# Altium PCB F电源板.PcbDoc
Units mil, origin at the board's own origin, x right, y up, seen from the top; angles counter-clockwise.
Board outline 4960.63 x 1771.65 mil, 4 copper layers (Top Layer, GND, PWR, Bottom Layer), stack 23.756 mil thick; 107 components, 59 nets, 267 pads, 65 vias.
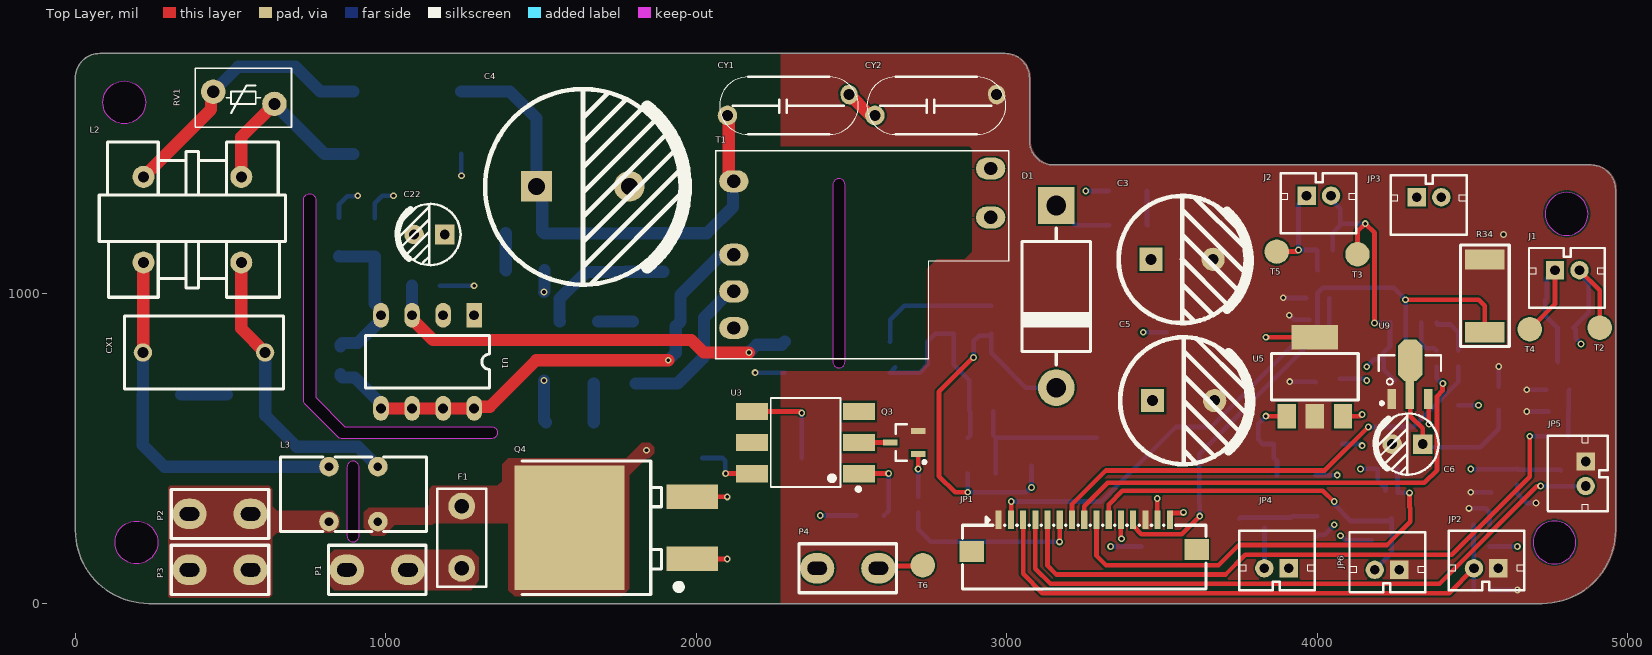
[diagram p0: Top Layer view]
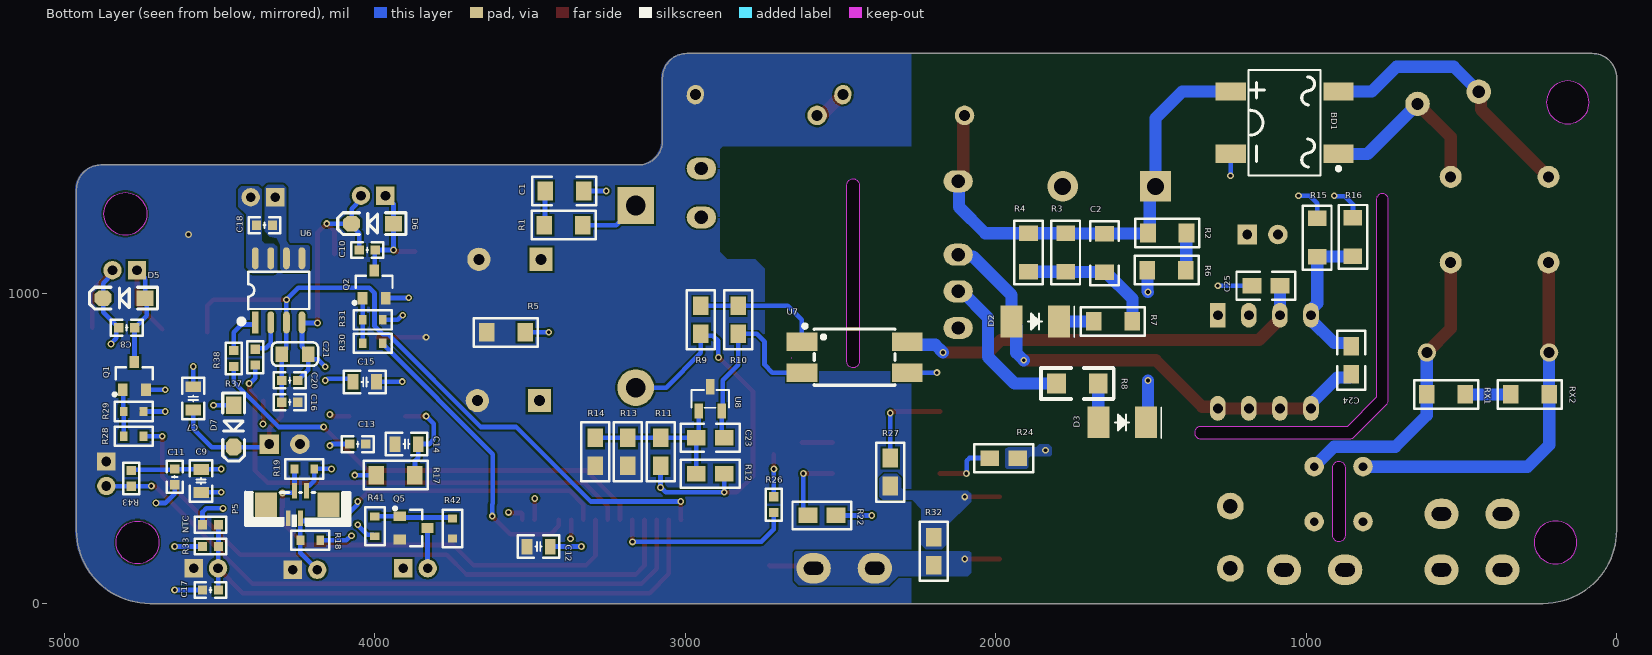
[diagram p1: Bottom Layer view, seen from below]
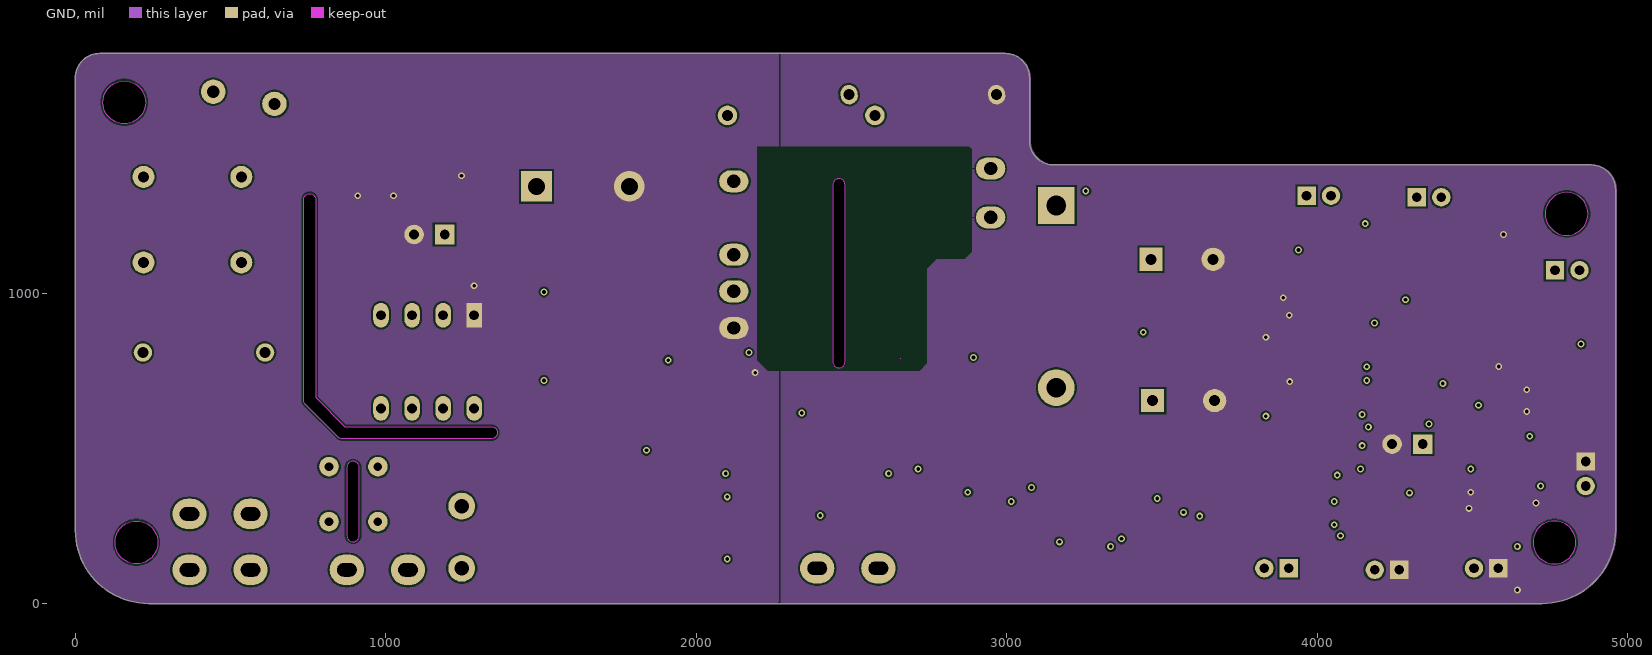
[diagram p2: GND]
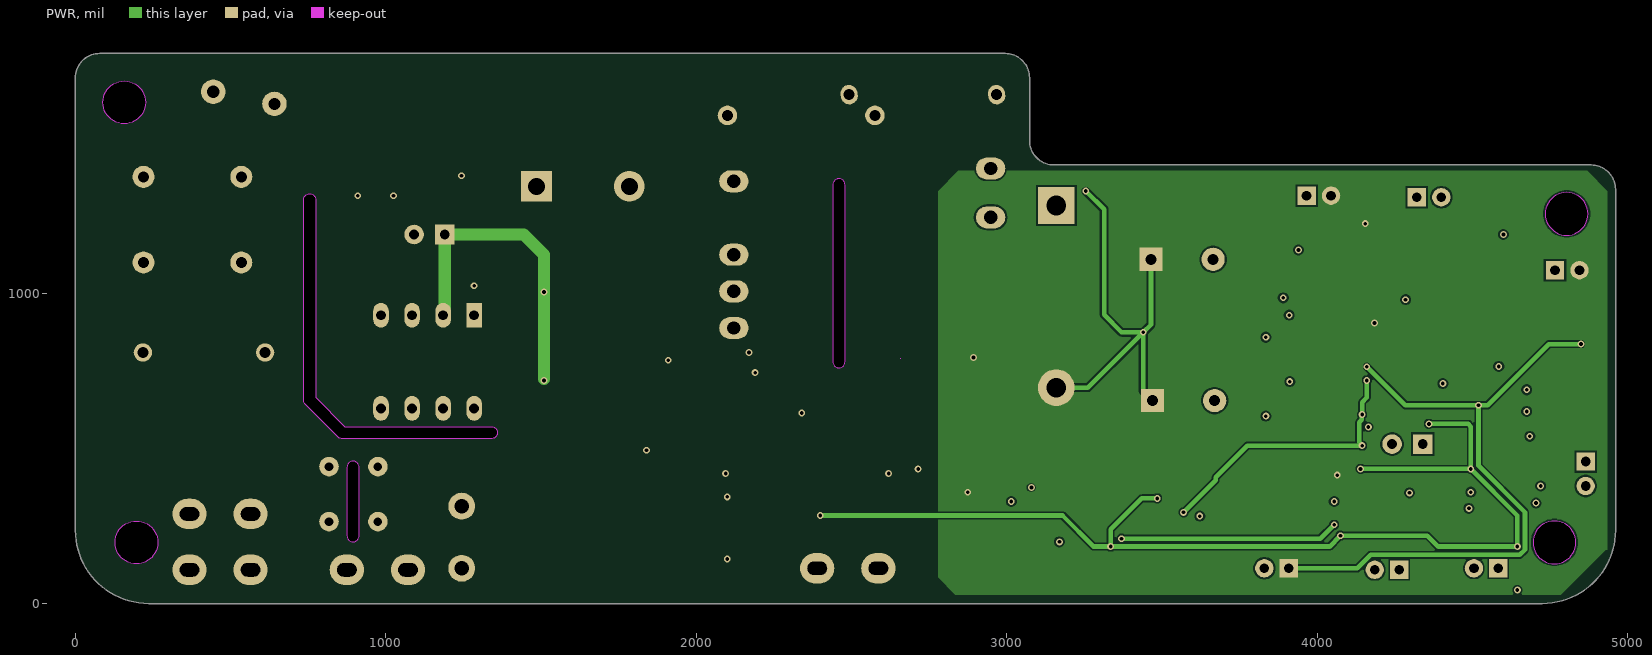
[diagram p3: PWR]
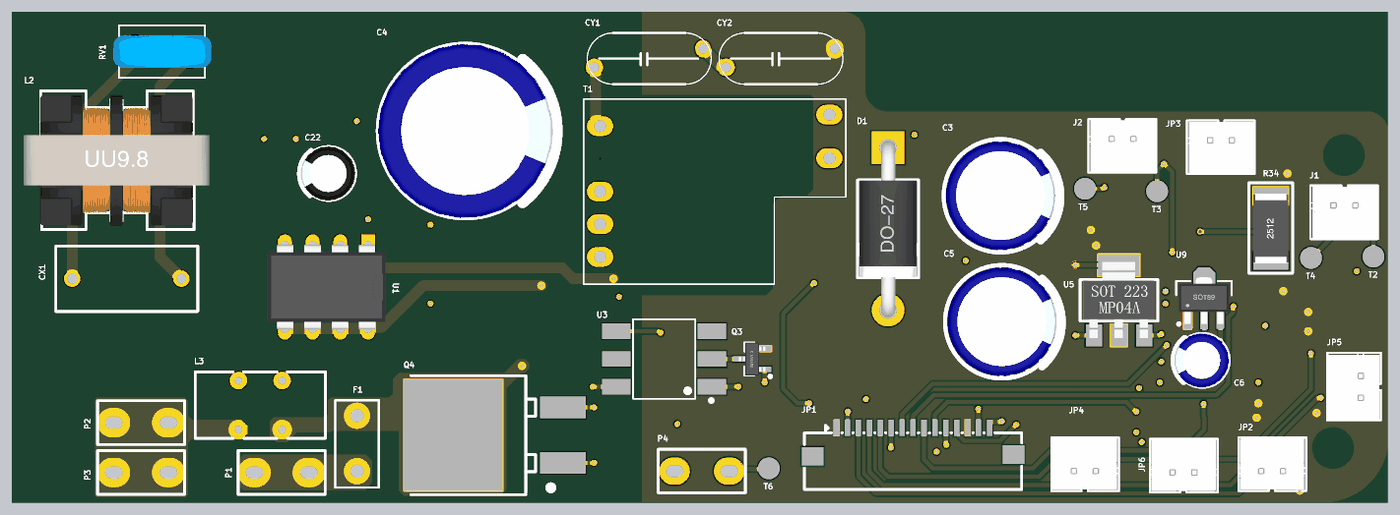
[diagram p4: 3D render of the assembled board from above, using the file's embedded part models]
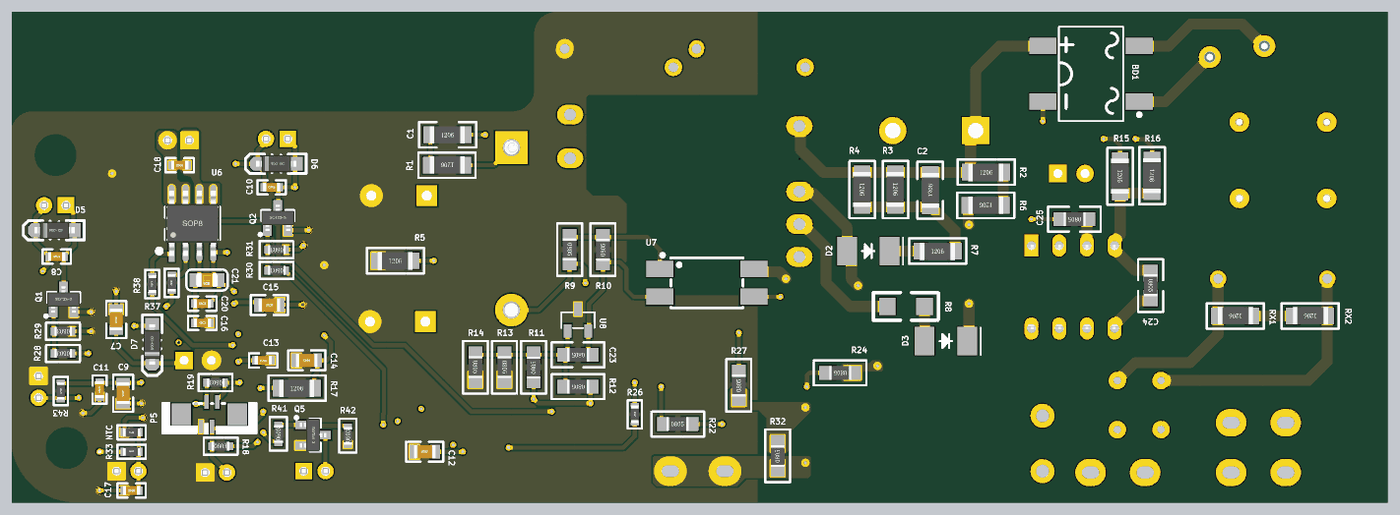
[diagram p5: 3D render of the assembled board from below, using the file's embedded part models]

## Layer stack, top to bottom
Top Solder: solder mask 0.4, Solder Resist, Dk 3.5
Top Layer: signal copper 1.4
Dielectric 2: prepreg 2.8, PP-006, Dk 4.1
GND: signal copper 1.378
Dielectric 1: dielectric 12.6, FR-4, Dk 4.8
PWR: signal copper 1.378
Dielectric 3: prepreg 2.8, PP-006, Dk 4.1
Bottom Layer: signal copper 1.4
Bottom Solder: solder mask 0.4, Solder Resist, Dk 3.5

## Board outline
0.55,237.71 0.55,1694.4 cw(c79.29,1694.4) 79.29,1773.14 2995.11,1773.14 cw(c2995.11,1694.4) 3073.85,1694.4 3073.85,1492.65 ccw(c3152.59,1492.65) 3152.59,1413.91 4882.44,1413.91 cw(c4882.44,1335.17) 4961.18,1335.17 4961.18,237.71 cw(c4724.96,237.71) 4724.96,1.49 236.77,1.49 cw(c236.77,237.71)
cut-out: 875.3,220 ccw(c895,220) 914.7,220 914.7,440 ccw(c895,440) 875.3,440
cut-out: 741.38,642.9 cw(c755.3,656.84) 735.6,656.84 735.6,1301.84 cw(c755.3,1301.84) 775,1301.84 775,665 868.46,571.54 1340.3,571.54 cw(c1340.3,551.84) 1360,551.84 cw(c1340.3,551.84) 1340.3,532.14 860.3,532.14 cw(c860.3,551.84) 846.37,537.91 846.38,537.9
cut-out: 2440.3,780 ccw(c2460,780) 2479.7,780 2479.7,1350 ccw(c2460,1350) 2440.3,1350
cut-out: 4734.8,1256.43 ccw(c4803.7,1256.43) 4803.7,1187.54 ccw(c4803.7,1256.43) 4872.6,1256.43 ccw(c4803.7,1256.43) 4803.7,1325.33 ccw(c4803.7,1256.43)
cut-out: 4695.43,198.34 ccw(c4764.33,198.34) 4764.33,129.44 ccw(c4764.33,198.34) 4833.23,198.34 ccw(c4764.33,198.34) 4764.33,267.23 ccw(c4764.33,198.34)
cut-out: 197.4,129.44 cw(c197.4,198.34) 128.5,198.34 cw(c197.4,198.34) 197.4,267.23 cw(c197.4,198.34) 266.3,198.34 cw(c197.4,198.34)
cut-out: 158.03,1546.76 cw(c158.03,1615.66) 89.13,1615.66 cw(c158.03,1615.66) 158.03,1684.56 cw(c158.03,1615.66) 226.93,1615.66 cw(c158.03,1615.66)

## Design rules (kind name [scope] priority, off if disabled: settings)
Clearance [All] p1: gap=6 ignorepadtopadclearanceinfootprint=FALSE
HoleSize [All] p1: absolutevalues=TRUE maxlimit=300 minlimit=1 maxpercent=80.000 minpercent=20.000
PolygonConnect [All] p1: connectstyle=Direct reliefconductorwidth=10 reliefentries=4 polygonreliefangle="90 Angle" airgapwidth=10
RoutingCorners [All] p1: cornerstyle=45-Degree minsetback=10 maxsetback=10
RoutingVias [All] p1: holewidth=12 width=22 viastyle="Through Hole" minholewidth=12 minwidth=22 maxholewidth=12 maxwidth=22
SilkToSolderMaskClearance [IsPad] p1: minsilkscreentomaskgap=0 clearancetoexposedcopper=TRUE
SolderMaskExpansion [All] p1: expansion=4 istentingtop=FALSE
UnRoutedNet [All] p1: checkbadconnections=TRUE
Width Width_AC [InNetClass('AC')] p1: maxlimit=50 minlimit=10 preferedwidth=39.37
Width Width_PWR [InNetClass('PWR')] p2: maxlimit=40 minlimit=15 preferedwidth=20
Width [All] p3: maxlimit=15 minlimit=8 preferedwidth=10
26 further rules are at their usual default settings.

## Classes and differential pairs
net class AC: FB NetBD1_1 NetBD1_2 NetBD1_3 NetC2_1 NetC24_1 NetC24_2 NetCX1_1 NetCX1_2 NetCY1_2 NetD2_2 NetD3_1 NetF1_2 NetL3_1 NetR2_2 NetR8_2 NetRX1_1
net class GND: GND SGND
net class PWR: 12V_EN +5V +5V_MCU +12V VCC

## Components (designator, comment, footprint, x,y, rotation, side; value= is the part's Value field where it differs from the comment)
BD1 "DB107S" DBS_L8.4-W6.4-P5.10-LS10.2-BL 1070,1550 r90 bottom
C1 "221" 1206c 3390,1330 r180 bottom
C2 "222" 1206c 1650,1130 r90 bottom
C3 "35V 470uF" "CAP 5.0*10*16" 3565,1110 r0 top
C4 "56U" "CAP 7.5*16*25" 1635.39,1343.5 r0 top
C5 "35V 470uF" "CAP 5.0*10*16" 3570,655 r0 top
C6 "100UF/25V" "CAP 2.5*5*11" 4290.79,515 r180 top
C7 "100nF/25V/0805" "C 0805_L" 4585,662.4 r90 bottom
C8 "100NF/50V/0603" "C 0603_L" 4799.41,890 r180 bottom
C9 "10UF/16V/0805" "C 0805_L" 4560,396.22 r270 bottom
C10 "100NF/50V/0603" "C 0603_L" 4024.41,1140 r180 bottom
C11 "100NF/50V/0603" "C 0603_L" 4645,409.41 r90 bottom
C12 "10UF/16V/0805" "C 0805_L" 3472.6,185 r180 bottom
C13 "100NF/50V/0603" "C 0603_L" 4055,515 r0 bottom
C14 "10UF/25V/0805" "C 0805_L" 3897.6,515 r0 bottom
C15 "10UF/16V/0805" "C 0805_L" 4032.6,715 r180 bottom
C16 "100NF/50V/0603" "C 0603_L" 4274.41,650 r180 bottom
C17 "100NF/50V/0603" "C 0603_L" 4529.41,45 r0 bottom
C18 "100NF/50V/0603" "C 0603_L" 4355.59,1220 r0 bottom
C20 "100NF/50V/0603" "C 0603_L" 4274.41,720 r180 bottom
C21 "22UF/25V/0805" 0805C-S 4215,805 r0 bottom
C22 "10U" "CAP 2.5*5*11 - BK" 1140.79,1190 r180 top
C23 "333" 0805C 2875,535 r0 bottom
C24 "22pF" 0805C 855,830 r270 bottom
C25 "103" 0805C 1085,1025 r0 bottom
CX1 "0.22uF" CAP-TH_L13.0-W6.0-P10.00-D1.2 415,810 r0 top
CY1 "400V  222" CY2-P10*4.7 2280,1605 r0 top
CY2 "400V  222" CY2-P10*4.7 2755,1605 r0 top
D1 "SR5100" do-27 3160,990 r270 top
D2 "4007" SMA 1950,910 r180 bottom
D3 "RS1M" SMA 1670,585 r180 bottom
D5 "ss24" SOD-123 4807.5,985 r0 bottom
D6 "ss24" SOD-123 4007.5,1225 r0 bottom
D7 "ss14" SOD-123 4455,572.5 r270 bottom
F1 "250V/3.15A" MST8*4 1245,315 r270 top
J1 "PH2.0-2P直插" PH2.0-LI-2P 4805.63,1075 r0 top
J2 "PH2.0-2P直插" PH2.0-LI-2P 4005.63,1315 r0 top
JP1 "Header 15" FPC-SMD_15P-P1.00_XUNPU_FPC-1.0FX-15PWCR-H20 3250,220 r0 top
JP2 "HDR-1X2" PH2.0-LI-2P 4544.37,115 r180 top
JP3 "HDR-1X2" PH2.0-LI-2P 4360.63,1310 r0 top
JP4 "HDR-1X2" PH2.0-LI-2P 3869.37,115 r180 top
JP5 "HDR-1X2" PH2.0-LI-2P 4865,419.37 r270 top
JP6 "HDR-1X2" PH2.0-LI-2P 4225,110 r180 top
L2 "" UU9.8 377.52,1237.8 r0 top
L3 "PDMCAT953-501MLN" IND-TH_4P-L12.0-W6.0_PDMCAT953-501MLN 896.26,353.58 r0 top
NTC "10K" "R 0603_L" 4529.41,255 r0 bottom
P1 "L" 4.8*0.8 875,110 r0 top
P2 "N" 4.8*0.8 565,290 r180 top
P3 "PTC-" 4.8*0.8 565,110 r180 top
P4 "PTC+" 4.8*0.8 2586.85,115 r180 top
P5 "Header 4" FPC-SMD_FPC-0.5-4P-LTH2.0 4249.61,320 r0 bottom
Q1 "AO3400" "SOT23-3L -big" 4775,735 r180 bottom
Q2 "AO3400" "SOT23-3L -big" 4002.4,1030 r180 bottom
Q3 "SS8050" SOT23-3N 2670,520 r90 top
Q4 "BTA12_600" TO-263AB_L10.0-W9.2-P5.08-LS15.4-BL 1790,245 r90 top
Q5 "AO3400" "SOT23-3L -big" 3875,245 r270 bottom
R1 "22R" 1206R 3392,1220 r0 bottom
R2 "1M" 1206R 1448,1195 r180 bottom
R3 "200K" 1206R 1775,1132 r270 bottom
R4 "200K" 1206R 1895,1132 r270 bottom
R5 "NC" 1206R 3578,875 r180 bottom
R6 "1M" 1206R 1450,1075 r0 bottom
R7 "47R" 1206R 1623,910 r180 bottom
R8 "10R" 1206 1670,710 r0 bottom
R9 "1K" 0805R 2950,960 r270 bottom
R10 "5.1k" 0805R 2830,870 r90 bottom
R11 "24k" 0805R 3080,445 r90 bottom
R12 "100k" 0805R 2875,420 r0 bottom
R13 "NC" 0805R 3185,535 r270 bottom
R14 "5.1k" 0805R 3290,535 r270 bottom
R15 "1R" 1206R 965,1180 r270 bottom
R16 "1R" 1206R 850,1182 r270 bottom
R17 "0R/1206" 1206R 3933,415 r180 bottom
R18 "10K/5%/0603" 0603R 4208,205 r180 bottom
R19 "10K/5%/0603" 0603R 4227,435 r0 bottom
R22 "330R/0805/5%" 0805R 2605,285 r180 bottom
R24 "330R/0805/5%" 0805R 1930,470 r0 bottom
R26 "1K/0603/5%" "R 0603_L" 2715,320 r90 bottom
R27 "330R/0805/5%" 0805R 2340,380 r90 bottom
R28 "100R/5%/0603" 0603R 4777,540 r0 bottom
R29 "10K/5%/0603" 0603R 4777,620 r0 bottom
R30 "100R/5%/0603" 0603R 4007,840 r0 bottom
R31 "10K/5%/0603" 0603R 4007,915 r0 bottom
R32 "330R/0805/5%" 0805R 2200,125 r90 bottom
R33 "10K" "R 0603_L" 4529.41,185 r180 bottom
R34 "0.2R/2512/1%" "R 2512_L" 4540,991.14 r90 top
R37 "1K/0603/5%" "R 0603_L" 4455,790.59 r90 bottom
R38 "1K/0603/5%" "R 0603_L" 4385,795 r90 bottom
R41 "100R/5%/0603" 0603R 4000,250 r90 bottom
R42 "10K/5%/0603" 0603R 3750,243 r90 bottom
R43 "10K/0603/1%" "R 0603_L" 4785,404.41 r270 bottom
RV1 "7D471K" "VDR 7D-5" 641.85,1630.32 r180 top
RX1 "2M" 1206R 550,675 r0 bottom
RX2 "2M" 1206R 280,675 r0 bottom
T1 "PQ2016" EE1610 2535,1125 r0 top locked
T2 "TP" TP_2.0MM 4910,890 r0 top
T3 "TP" TP_2.0MM 4130,1126 r0 top
T4 "TP" TP_2.0MM 4685,885 r0 top
T5 "TP" TP_2.0MM 3870,1135 r0 top
T6 "TP" TP_2.0MM 2730,125 r0 top
U1 "ME8123" DIP8 1285,930 r270 top
U3 "3063" SMD-6_L7.3-W6.5-P2.54-LS10.2-BL 2352.44,520 r90 top
U5 "MD8550/SOT223-3" SOT-223 3990,735 r0 top
U6 "MD7622" SOP8_N 4310,1010 r90 bottom
U7 "PC817" SMD-4 2455,795 r180 bottom
U8 "ME431" SOT-23-3_ME431 2920,660.63 r270 bottom
U9 "MD7350A/SOT89" SOT89_M 4299,741 r0 top

## Footprints (in the part's own frame and the unit in brackets; to place one, negate y for a bottom-side part, rotate by r counter-clockwise, add the part's x,y. Pads: shape width x height; smd on the part's side, far side on the other; paste and mask are expansions set on the pad)
4.8*0.8 [mm]
  oval 2.8x2.5 hole 1.1 slot 1.6 at 0 deg: 1(0,0) 1(5,0)
  silkscreen extent -1.49,-2.01 6.49,2.01, body extent -1.52,-0.41 6.49,0.39, height 9.3
0603R [mil]
  rect 25x30 smd: 1(-32,0) 2(32,0)
  silkscreen extent -61,-31 61,31, body extent -32,-16 30,16, height 18
0805C [mil] "2.0mmx1.2mm（蒜米工坊）"
  rect 60x50 smd: 1(0,0) 2(90,0)
  silkscreen extent -50,-45 140,45, body extent 5,-25 83,25, height 22
0805C-S [mil]
  rect 40x50 smd: 1(0,0) 2(85,0)
  silkscreen extent -32,-38 117,38, body extent 3,-25 82,25, height 30
0805R [mil]
  rect 60x50 smd: 1(0,0) 2(90,0)
  silkscreen extent -50,-45 140,45, body extent 5,-25 83,25, height 22
1206 [mm]
  rect 1.52x1.6 smd: 1(0,0) 2(3.42,0)
  silkscreen extent -1.27,-1.27 4.69,1.27
1206c [mil] "3.2mmx1.6mm（蒜米工坊）"
  rect 50x60 smd: 1(-62,0) 2(62,0)
  silkscreen extent -103,-46 103,46, body extent -64,-32 62,31, height 24
1206R [mil]
  rect 50x60 smd: 1(-62,0) 2(62,0)
  silkscreen extent -103,-46 103,46, body extent -64,-32 62,31, height 24
"C 0603_L" [mil] "无极性贴片电容"
  rect 30x30 smd: 1(-25.59,0) 2(25.59,0)
  silkscreen extent -51,-26 51,26, body extent -31,-16 31,16, height 32
"C 0805_L" [mil] "无极性贴片电容"
  rect 35x50 smd: 1(-37.4,0) 2(37.4,0)
  silkscreen extent -67,-36 67,36, body extent -39,-24 39,24, height 20
"CAP 2.5*5*11" [mm] "脚距2.5mm直径5mm高度11mm"
  rect 1.6x1.6 hole 0.8: 1(-1.25,0)
  round 1.6 hole 0.8: 2(1.25,0)
  silkscreen extent -2.55,-2.5 2.6,2.5, body extent -2.5,-2.5 2.51,2.5, height 11.03
"CAP 2.5*5*11 - BK" [mm] "脚距2.5mm直径5mm高度11mm"
  rect 1.6x1.6 hole 0.8: 1(-1.25,0)
  round 1.6 hole 0.8: 2(1.25,0)
  silkscreen extent -2.55,-2.5 2.6,2.5, body extent -2.5,-2.5 2.51,2.5, height 11.04
"CAP 5.0*10*16" [mm] "脚距5mm直径10mm高度16mm"
  rect 1.9x1.9 hole 0.9: 1(-2.54,0)
  round 1.9 hole 0.9: 2(2.54,0)
  silkscreen extent -5.19,-5.21 5.5,5.19, body extent -5,-5 5.01,5, height 16.04
"CAP 7.5*16*25" [mm] "脚距7.5mm直径16mm高度25mm"
  rect 2.5x2.5 hole 1.4: 1(-3.8,0.038)
  round 2.5 hole 1.4: 2(3.8,0.038)
  silkscreen extent -8,-8 8.42,8, body extent -8,-8 8.01,8, height 25.03
CAP-TH_L13.0-W6.0-P10.00-D1.2 [mm]
  round 1.5 hole 0.9: 1(-5,0) 2(5,0)
  silkscreen extent -6.5,-3 6.5,3, body extent -6.47,-2.97 6.51,2.94, height 12.5
CY2-P10*4.7 [mm]
  round 1.6 hole 0.9: 1(-4.55,-0.8)
  oval 1.4x1.6 hole 0.9 rot 10: 2(5.4,0.9)
  silkscreen extent -5.2,-2.35 6.15,2.35, body extent -4.96,-2.12 5.88,2.13, height 8
DBS_L8.4-W6.4-P5.10-LS10.2-BL [mm]
  rect 1.505x2.47 smd: 1(-2.55,-4.41) 2(2.55,-4.41) 3(2.55,4.41) 4(-2.55,4.41)
  silkscreen extent -4.33,-4.56 4.33,2.95
DIP8 [mil] "8脚300mil直插集成电路（蒜米工坊）"
  rect 80x50 hole 32: 1(0,0)
  oval 80x50 hole 32: 2(0,-100) 3(0,-200) 4(0,-300) 5(300,-300) 6(300,-200) 7(300,-100) 8(300,0)
  silkscreen extent 65,-350 235,50, body extent -3,-363 303,63, height 177
do-27 [mm] "5.2*14.9mm(直径，脚距）"
  rect 3x3 hole 1.6: 1(-7.45,0)
  round 3 hole 1.6: 2(7.45,0)
  silkscreen extent -5.59,-2.79 5.59,2.79, body extent -8.1,-2.6 8.1,2.6, height 5.25
EE1610 [mm]
  oval 2.4x1.8 hole 1.1: 1(-10.5,6) 3(-10.5,0) 5(-10.5,-6) 7(10.5,7.05)
  round 0 all layers, no hole: 2(-10.5,3)
  oval 2.4x1.8 hole 1.1 paste+0: 4(10.5,3.05) 6(-10.5,-3)
  Keep-Out Layer lines w0.1: 3.1,-8.49 3.15,-8.49 3.16,-8.48
  silkscreen extent -12.02,-8.52 12,8.5, body extent -12,-8.51 11.97,8.51, height 15.5
FPC-SMD_15P-P1.00_XUNPU_FPC-1.0FX-15PWCR-H20 [mm]
  rect 0.5x1.5 smd paste+0 mask+0.05: 1(-7,1.3) 2(-6,1.3) 3(-5,1.3) 4(-4,1.3) 5(-3,1.3) 6(-2,1.3) 7(-1,1.3) 8(0,1.3) 9(1,1.3) 10(2,1.3) 11(3,1.3) 12(4,1.3) 13(5,1.3) 14(6,1.3) 15(7,1.3)
  rect 2x1.7 smd paste+0 mask+0.05: 16(9.2,-1.143) 17(-9.2,-1.3)
  silkscreen extent -9.95,-4.35 9.95,1.53
FPC-SMD_FPC-0.5-4P-LTH2.0 [mm]
  rect 0.4x1.25 smd: 1(-0.75,-1.125) 2(-0.25,1.125) 3(0.25,-1.125) 4(0.75,1.125)
  rect 1.8x2 smd: 5(2.55,0) 6(-2.55,0)
  silkscreen extent -4.3,-1.01 4.28,1.83
IND-TH_4P-L12.0-W6.0_PDMCAT953-501MLN [mm]
  round 1.6 hole 0.7: 1(-2,-2.25) 2(-2,2.25) 3(2,2.25) 4(2,-2.25)
  silkscreen extent -5.97,-3.05 5.97,3.05, body extent -5.95,-3.03 5.96,3.06, height 12.5
MST8*4 [mm]
  round 2.2 hole 1.2: 1(0,0) 2(5.08,0)
  silkscreen extent -1.42,-2 6.57,2, body extent -1.42,-2 6.57,2, height 8.5
PH2.0-LI-2P [mm] "长：5.9mm，宽：4.7mm，高：6mm"
  rect 1.5x1.5 hole 0.8: 1(-1,0)
  round 1.5 hole 0.8: 2(1,0)
  silkscreen extent -3.13,-3.08 3.06,1.82, body extent -2.95,-3 2.95,1.7, height 6.01
"R 0603_L" [mil] "1/10W贴片电阻"
  rect 30x30 smd: 1(-25.59,0) 2(25.59,0)
  silkscreen extent -51,-26 51,26, body extent -31,-16 31,16, height 16
"R 2512_L" [mm] "1W贴片电阻"
  rect 1.65x3.2 smd: 1(-2.95,0) 2(3,0)
  silkscreen extent -4.1,-2 4.2,2, body extent -3.2,-1.6 3.2,1.6, height 0.55
SMA [mm]
  rect 1.8x2.6 smd: 1(0,0) 2(3.9,0)
  silkscreen extent 1.37,-1.28 5.14,1.24
SMD-4 [mm]
  rect 2.5x1.5 smd: 1(-4.3,1.27) 2(-4.3,-1.27) 3(4.3,-1.27) 4(4.3,1.27)
  silkscreen extent -4.21,-2.3 3.3,2.69, body extent -4.34,-2.31 4.34,2.31, height 3.5
SMD-6_L7.3-W6.5-P2.54-LS10.2-BL [mil]
  rect 56x102.36 smd: 1(-100,-172.44) 2(0,-172.44) 3(100,-172.44) 4(100,172.44) 5(0,172.44) 6(-100,172.44)
  silkscreen extent -156,-176 144,112, body extent -145,-187 143,184, height 169
SOD-123 [mil] "2.7x1.6X1.1mm（长宽高，不包括引脚）"
  rect 55x50 smd: 1(-67.5,0)
  oct 55x50 smd: 2(67.5,0)
  silkscreen extent -108,-35 112,35, body extent -73,-31 73,31, height 48
SOP8_N [mm] "5*6*1.8mm（长宽高）"
  rect 1.8x0.55 smd: 1(-2.625,1.905)
  oval 1.8x0.55 smd: 2(-2.625,0.635) 3(-2.625,-0.635) 4(-2.625,-1.905) 5(2.625,-1.905) 6(2.625,-0.635) 7(2.625,0.635) 8(2.625,1.905)
  silkscreen extent -2.69,-2.5 1.52,3.2, body extent -3,-2.5 3,2.5, height 1.9
"SOT23-3L -big" [mm] "3x1.3x1mm(长宽高)"
  rect 0.8x1 smd: 1(-0.95,-1.143) 2(0.95,-1.143) 3(0,1.125)
  silkscreen extent -1.73,-1.65 1.5,0.7, body extent -1.5,-1.2 1.5,1.2, height 1.05
SOT23-3N [mm] "3x1.3x1mm(长宽高)"
  rect 0.5x1.2 smd: 1(-0.95,-1.143) 2(0.95,-1.143) 3(0,1.143)
  silkscreen extent -1.72,-1.78 1.5,0.7, body extent -1.5,-1.2 1.5,1.2, height 1.05
SOT89_M [mm] "4.6x4.3x1.6mm(长宽高)"
  rect 0.7x1.6 smd: 1(-1.5,-2.054) 3(1.5,-2.054)
  rect 0.7x2.4 smd: 2(0,-1.676)
  oct 2x3.4 smd: 2(0.025,1.118)
  silkscreen extent -2.54,-2.52 2.54,1.52, body extent -2.3,-2.4 2.3,1.9, height 1.6
SOT-23-3_ME431 [mm]
  rect 1.25x0.7 smd: 1(1,-0.95) 2(1,0.95) 3(-1,0)
  silkscreen extent -0.73,-1.53 0.73,1.53
SOT-223 [mil]
  rect 59x79 smd: 1(-88,-130) 2(2.55,-130) 3(93.1,-130)
  rect 150x79 smd: 2(1.88,123.54)
  silkscreen extent -137,-78 143,72, body extent -126,-139 130,135, height 67
TO-263AB_L10.0-W9.2-P5.08-LS15.4-BL [mm]
  rect 2x4.2 smd: 1(-2.54,-5.025) 3(2.54,-5.025)
  rect 10.2x9 smd: 2(0,5.025)
  silkscreen extent -5.46,-4.16 5.46,8.92
TP_2.0MM [mm]
  round 2 smd: 1(0,0)
UU9.8 [mm] "17*12*17mm(长宽高）"
  round 1.8 hole 0.9: 1(-4,3.5) 2(-4,-3.5) 3(4,-3.5) 4(4,3.5)
  silkscreen extent -7.62,-6.35 7.62,6.35, body extent -8.5,-6 8.5,6, height 17.05
"VDR 7D-5" [mm] "压敏电阻9mm*4.5mm(直径*厚度）"
  round 2 hole 1: 1(0,0.5) 2(5,-0.5)
  silkscreen extent -1.4,-2.41 6.48,2.41, body extent -2,-1.5 7,1.5, height 10

## Part data
BD1: library part DB107S_C190797, Current - Rectified=1A, JLCPCB Part Class="Extended Part", Manufacturer=Hottech(合科泰), Operating Temperature=-55℃~+150℃@(Tj), Peak Forward Surge Current=50A, Reverse Leakage Current (Ir)=10uA@1kV, Voltage - DC Reverse(Vr)=1kV, Voltage - Forward(Vf@If)=1.1V@1A, Add into BOM=yes, Convert to PCB=yes, Datasheet=https://atta.szlcsc.com/upload/public/pdf/source/20220506/F63E10C96512ED5D2BE34C5EF69F07CC.pdf, Device=DB107S_C190797, LCSC Part Name=DB107S, Manufacturer Part=DB107S, Supplier=LCSC, Supplier Footprint=DBS, Supplier Part=C190797, Symbol=DB107S_C190797
C1 C2 C23 C24 C25 CX1 CY1 CY2: library part C.2, "C？"
C3 C4 C5 C22: library part CB.2, "C?"
C6 C7 C8 C9 C10 C11 C12 C13 C14 C15 C16 C17 C18 C20 C21: library part CAPB
D1 D2 D3: library part D.2
D5 D6 D7: library part DIODE
F1: library part FUSE
J1 J2: library part CON2
JP1: "Header, 15-Pin", LatestRevisionDate=17-Jul-2002, LatestRevisionNote="Re-released for DXP Platform.", Publisher="Altium Limited"
JP2 JP3 JP4 JP5 JP6: library part "Header 2", "2P接插件", BOM名称=2P接插件, 学习资源=www.ooocke.com, 版权归属=源创客
L2: library part LC.6
L3: Current Rating=3A, DC Resistance(DCR)=16mΩ, Impedance @ Frequency=-, JLCPCB Part Class="Extended Part", LCSC Part Name="两路 插件共模滤波器", Manufacturer=PROD(谱罗德), Add into BOM=yes, Convert to PCB=yes, Datasheet=https://atta.szlcsc.com/upload/public/pdf/source/20220914/CD849A92925D682378A854E6D11F1CD4.pdf, Device=PDMCAT953-501MLN, Inductance @ Frequency=-, Manufacturer Part=PDMCAT953-501MLN, Number of Lines=2, Operating Temperature=-, Supplier=LCSC, Supplier Footprint=插件, Supplier Part=C5158066, Symbol=PDMCAT953-501MLN, Voltage Rating - DC=-, Voltage Withstand=-
NTC R17 R22 R24 R26 R27 R32 R33 R34 R37 R38 R43: library part R
P1 P2 P3 P4: library part BAT, BOM_JLCPCB Part Class="Extended Part", BOM_Manufacturer=null, BOM_Manufacturer Part=TP-红色测试点, BOM_Supplier=LCSC, BOM_Supplier Part=C9900007423, Contributor=lcsc, link=https://atta.szlcsc.comnull, spicePre=U, spiceSymbolName=TP-红色测试点
P5: "Header, 4-Pin", LatestRevisionDate=17-Jul-2002, LatestRevisionNote="Re-released for DXP Platform.", Publisher="Altium Limited"
Q1 Q2 Q5: library part NMOS-2, "N-Channel Power MOSFET", Code_JEDEC=TO-220-AB, ComponentLink1Description="Manufacturer Link", ComponentLink1URL=http://www.irf.com/, DatasheetDocument=PD-9.814, LatestRevisionDate=17-Jul-2002, LatestRevisionNote="Re-released for DXP Platform.", Note="Pin 2 is electrically connected to pin 4.", PackageReference=TO-220AB, Published=8-Jun-2000, Publisher="Altium Limited"
Q3: library part 8050-SMD, "高频放大-NPN型", BOM名称=高频放大-NPN型, 学习资源=www.ooocke.com, 属性="40V 1.5A 1W 100MHZ", 版权归属=源创客
Q4: "双向可控硅", BOM名称=双向可控硅, 学习资源=www.ooocke.com, 版权归属=源创客
R1 R2 R3 R4 R5 R6 R7 R8 R9 R10 R11 R12 R13 R14 R15 R16 RX1 RX2: library part R.2
R18 R19 R28 R29 R30 R31 R41 R42: library part RESA, Footprint.=R0603, SPC.=5%
RV1: library part RM
T1: library part T.6
U1: library part 8603
U3: library part MOC3021
U5: library part AMS1117-3.3V
U6: library part 013a_1
U7: library part OP
U8: library part ME431AXG, JLCPCB Part Class="Extended Part", Manufacturer=MICRONE(南京微盟), Minimum Cathode Current for Regulation=1mA, Operating Temperature=-40℃~+150℃@(TA), Output Current=100mA, Output Voltage=2.5V~36V, Add into BOM=yes, Comment_1=ME431AXG, Convert to PCB=yes, Datasheet=https://atta.szlcsc.com/upload/public/pdf/source/20161114/1479092091701.pdf, Device=ME431AXG, LCSC Part Name=ME431AXG, Manufacturer Part=ME431AXG, Output Type=可调, Supplier=LCSC, Supplier Footprint=SOT-23, Supplier Part=C85795, Symbol=ME431AXG
U9: library part ME6118A_SOT89

## Via types
v1: diameter 22, hole 12, Top Layer to Bottom Layer, 65 vias

## Nets (pads, with @x,y where several pads share a name; then routed paths per layer and width w, separated by ;. In a path a pad name is that pad's centre, name@x,y a point inside that pad or via, vN(x,y) a via of type N, cw(c..) or ccw(c..) an arc to the next point about the centre after c; other vN are vias at no path point)
12V_EN: JP1.11 R41.1 | length 837
  Top Layer w15: JP1.11 3368.11,213.78 3370,211.89 v1(3370,210)
  PWR w15: v1(3370,210) 4010,210 v1(4055,255)
  Bottom Layer w15: R41.1 4004.71,222.71 4024.61,222.71 4055,253.11 v1(4055,255)
+5V: C13.2 C15.1 JP1.15 U5.3 | length 1179.9
  Top Layer w15: JP1.15 3525.6,290.86 3527.94,293.21 3566.31,293.21 3568.11,295 v1(3570,295) ; U5.3 4138.11,605 4143.11,610 v1(4145,610)
  PWR w15: v1(3570,295) 3673.17,398.17 3673.17,408.17 3775,510 v1(4145,510) 4145,511.89 4135.5,521.39 4135.5,585.15 4143.66,593.31 4143.66,608.66 v1(4145,610) 4145,650 4160,665 v1(4160,720)
  Bottom Layer w15: C15.1@4072.4,725 4153.11,725 4158.11,720 v1(4160,720) ; C13.2 4138.1,515 4143.11,510 v1(4145,510)
+5V_MCU: C9.1 C11.2 C12.2 JP1.14 P5.1 R18.2 R19.1 R22.2 R33.1 R43.1 U9.3 | length 4494.5
  Top Layer w15: v1(3485,340) 3485.61,339.39 3485.61,271.79 JP1.14 ; U9.3@4359.03,654.15 4359.03,580.97 v1(4360,580)
  PWR w15: v1(2400,285) 3180,285 3280,185 v1(3335,185) ; v1(3485,340) 3435,340 3335,240 v1(3335,185) ; v1(4140,435) v1(4495,435) ; v1(4360,580) 4486.21,580 4495,571.21 v1(4495,435) ; v1(3335,185) 4040,185 v1(4075,220) 4355,220 4390,185 v1(4645,185) 4645,285 v1(4495,435)
  Bottom Layer w15: v1(2400,285) R22.2 ; v1(3335,185) C12.2 ; v1(4075,220) 4076.89,220 4091.89,205 R18.2 ; v1(4140,435) R19.1 4195,397.5 4211.1,381.4 4219.71,381.4 4220.08,381.02 P5.1 ; v1(4495,435) 4495.69,434.31 4559.31,434.31 C9.1 4560.69,434.31 4644.31,434.31 C11.2 4647.5,432.5 4782.5,432.5 R43.1 ; R33.1 v1(4645,185)
+12V: C1.2 C3.1 C5.1 C8.1 C10.1 C20.2 C21.1 D1.2 D5.2 D6.2 D7.1 J1.2 J2.2 JP4.1 R5.2 R9.2 R11.1 R12.1 R17.1 T2.1 T3.1 U6.4 | length 6683.7
  Top Layer w15: v1(2875,360) 2834,360 2782,412 2782,683 v1(2893,794) ; T3.1 4130,1200 v1(4155,1225) 4185,1195 v1(4185,905) ; J1.2 4910,1010 T2.1
  PWR w15: v1@3078.11,375 v1(3080,375) ; D1.2 3261.69,696.69 v1(3440,875) ; v1(3255,1330) 3314,1271 3314,931 3370,875 v1(3440,875) ; C3.1 3465,900 v1(3440,875) ; C5.1 3440.1,684.9 3440.1,778.28 3440,778.38 v1(3440,875) ; JP4.1 4129.78,115 4172.81,158.03 4652.68,158.03 4669.5,174.85 4669.5,295.5 4520,445 v1(4520,640) ; v1(4160,764) 4284,640 v1(4520,640) ; v1(4850,837) 4746,837 4549,640 v1(4520,640)
  Bottom Layer w15: R12.1 v1(2875,360) 3063.11,360 3078.11,375 v1(3080,375) R11.1 ; v1(2893,794) 2894.34,795.34 2894.34,847.34 2911.29,864.29 2944.29,864.29 R9.2 ; R9.2@2950,865 2950,808.79 3062.09,696.69 D1.2 ; v1(3255,1330) C1.2 ; v1(3440,875) R5.2 ; R17.1 v1(4065,415) ; J2.2 4045,1303.08 4075,1273.08 D6.2 ; C10.1 4050,1194.39 4075,1219.39 D6.2 ; v1(4155,1225) D6.2 ; v1(4160,764) 4183.69,787.69 4202.5,787.69 C21.1@4215,800.19 ; v1(4185,905) 4233.35,905 U6.4 4235,830 4215,810 C21.1 C21.1@4215,800.19 ; C20.2 4215,753.82 C21.1@4215,800.19 ; D7.1 v1(4520,640) ; J1.2 4845,1063.08 4875,1033.08 D5.2 4875,940 C8.1 4832.5,882.5 4832.5,856.39 4850,838.89 v1(4850,837)
DCF_CTRL: JP1.5 R28.1 | length 2033.3
  Top Layer w15: JP1.5 3131.9,123.11 3160,95 3705,95 3768.03,158.03 4433.03,158.03 4685,410 v1(4685,540)
  Bottom Layer w15: v1(4685,540) R28.1
FAN_CTRL: JP1.12 R30.1 | length 974.4
  Top Layer w15: JP1.12 3407.48,251.49 3433.98,225 3564.35,225 v1(3622.17,282.83)
  Bottom Layer w15: v1(3622.17,282.83) 3622.17,321.65 3620,323.83 3620,482.5 3975,837.5 R30.1
FB: C25.1 U1.3 U7.4 | length 1367
  Top Layer w39.37: U1.3 1085,917.88 1152.88,850 1984.53,850 2024.53,810 v1(2170,810)
  Bottom Layer w39.37: U1.3 C25.1 ; v1(2170,810) 2195.16,835.16 2275.87,835.16 U7.4
GND: BD1.4 C4.2 C22.2 C25.2 R15.1 R16.1 T1.5 U1.1 U7.3 | length 510
  Bottom Layer w15: R16.1 850,1287 876.66,1313.66 908.66,1313.66 v1(910,1315) ; R15.1 965,1291 989,1315 v1(1025,1315) ; C25.2 v1(1285,1025) ; BD1.4 1244,1449.23 v1(1244,1379) ; v1(2190,745) U7.3
KEY_IO: JP1.4 JP5.2 R43.2 | length 2081.5
  Top Layer w15: JP1.4 3092.52,113.79 3141.31,65 4394.15,65 4707.81,378.66 4718.66,378.66 v1(4720,380)
  Bottom Layer w15: v1(4720,380) 4720.59,379.41 4784.41,379.41 R43.2 4785.59,379.41 4864.41,379.41 JP5.2
MOTOR_Curr: C16.1 C20.1 C21.2 JP1.2 R34.1 U6.3 | length 2377
  Top Layer w15: JP1.2 3014.39,271.79 3014.39,329.39 v1(3015,330) ; v1(4285,980) 4520,980 4540,960 R34.1
  Bottom Layer w15: v1(3015,330) 3305,330 3545,570 3658.41,570 3956.91,868.5 3975.09,868.5 4001,894.41 4001,1000.72 4018.46,1018.19 4246.81,1018.19 v1(4285,980) U6.3 4285,820 C21.2 4300,800 C20.1 C16.1
MOTOR_IN1: JP1.8 R38.1 | length 1579.5
  Top Layer w15: JP1.8 3250.01,315.01 3325,390 4345,390 4386.33,431.33 4386.33,669 4403.66,686.33 4403.66,708.66 v1(4405,710)
  Bottom Layer w15: R38.1@4385,765 4385,727.5 4401.16,711.34 4403.66,711.34 v1(4405,710)
MOTOR_IN2: JP1.7 R37.1 | length 1507.2
  Top Layer w15: JP1.7 3210.64,320.64 3320,430 4025,430 v1(4165,570)
  Bottom Layer w15: v1(4165,570) 4310,570 4455,715 R37.1
NetBD1_1: BD1.1 L2.4 RV1.1 | length 600.5
  Top Layer w39.37: L2.4 535,1503.78 RV1.1
  Bottom Layer w39.37: RV1.1 802.87,1449.61 BD1.1
NetBD1_2: BD1.2 L2.1 RV1.2 | length 885.1
  Top Layer w39.37: L2.1 437.47,1593.02 437.47,1642.47 RV1.2
  Bottom Layer w39.37: RV1.2 525,1730 710,1730 789.61,1650.39 BD1.2
NetBD1_3: BD1.3 C2.2 C4.1 CY1.1 R2.1 R3.1 R4.1 T1.1 | length 1607.2
  Top Layer w39.37: CY1.1 2105.39,1568.99 2105.39,1375.77 2119.94,1361.22 T1.1
  Bottom Layer w39.37: BD1.3 1399.61,1650.39 1485.79,1564.21 C4.1 1504.69,1326.1 1504.69,1200.31 R2.1 1511.5,1193.5 1648.5,1193.5 C2.2 1651,1193 1774,1193 R3.1 R4.1 2034,1194 2118.33,1278.33 T1.1@2118.33,1361.22
NetC1_1: C1.1 R1.2 | length 110.8
  Bottom Layer w15: C1.1 3452,1222 R1.2
NetC2_1: C2.1 R3.2 R4.2 R7.2 | length 444.5
  Bottom Layer w39.37: R7.2 1560,911 1560,983 1645,1068 C2.1 1651,1069 1774,1069 R3.2 R4.2
NetC6_1: C6.1 C7.1 D7.2 U9.2 | length 621.4
  Top Layer w15: U9.2@4300,785 4299.5,784.5 4299.5,675.5 4299,675 4300.1,673.9 4300.1,605.26 4340,565.35 C6.1
  Bottom Layer w15: C6.1 4350,505 D7.2 4525,505 4585,565 C7.1
NetC8_2: C8.2 D5.1 J1.1 Q1.3 T4.1 | length 548.9
  Top Layer w15: T4.1 4766.26,966.26 J1.1
  Bottom Layer w15: J1.1 4740,1048.74 D5.1 4735,980 4735,928.82 C8.2 4774.41,889.41 4774.41,779.88 Q1.3
NetC10_2: C10.2 D6.1 J2.1 Q2.3 T5.1 | length 384
  Top Layer w15: T5.1 3933.11,1135 3938.11,1140 v1(3940,1140)
  Bottom Layer w15: J2.1 3940,1288.74 D6.1 v1(3940,1140) C10.2 4000.61,1138.21 4000.61,1076.08 Q2.3
NetC14_1: C14.1 R17.2 U5.1 | length 313.2
  Top Layer w15: v1(3835,605) U5.1
  Bottom Layer w15: v1(3835,605) 3810,580 3810,530 3825,515 C14.1 3860.2,470.48 3871,459.67 R17.2
NetC18_1: C18.1 JP3.1 U6.5 U6.6
NetC18_2: C18.2 JP3.2 U6.7 U6.8
NetC23_1: C23.1 R10.1 U7.2 U8.2 | length 685.7
  Bottom Layer w15: U7.2@2641.51,762.22 U7.2 2720,745 2745,770 2745,845 2770,870 R10.1 2830,770 2880,720 2880,623.86 U8.2 2882.6,542.6 C23.1
NetC23_2: C23.2 R11.2 R12.2 R13.1 R14.1 U8.1 | length 529.4
  Bottom Layer w15: U8.1 2957.4,542.6 C23.2 ; R12.2 C23.2 ; R14.1 R13.1 R11.2 C23.2
NetC24_1: C24.1 R15.2 R16.2 U1.4 | length 495.2
  Bottom Layer w39.37: R16.2 851,1119 964,1119 R15.2 965,967.88 985,947.88 U1.4 985,915 910.31,840.31 860.31,840.31 855,835 C24.1
NetC24_2: C24.2 D2.1 T1.3 U1.5 U1.6 U1.7 U1.8 | length 1628.6
  Top Layer w39.37: U1.5 U1.6 U1.7 U1.8 1285,630.16 1289.91,635.07 1335.07,635.07 1485,785 v1(1910,785)
  Bottom Layer w39.37: C24.2 855,735 860.31,729.69 900.31,729.69 985,645 U1.5 ; v1(1910,785) 1934.25,809.25 1934.25,894.25 D2.1 1950,995 2073.97,1118.97 2115.59,1118.97 T1.3
NetCX1_1: CX1.1 L2.2 L3.2 RX2.1 | length 1217.3
  Top Layer w39.37: CX1.1 219.09,810.94 219.09,1099.06 L2.2
  Bottom Layer w39.37: CX1.1 218.07,809.93 218.07,675.07 RX2.1 218,512 287.84,442.16 L3.2
NetCX1_2: CX1.2 L2.3 L3.3 RX1.2 | length 955.6
  Top Layer w39.37: L2.3 535,886.85 CX1.2
  Bottom Layer w39.37: CX1.2 611.93,809.93 611.93,675.07 RX1.2 612,608 713.55,506.45 910.71,506.45 L3.3
NetCY1_2: CY1.2 CY2.1 | length 111
  Top Layer w39.37: CY1.2 2493.67,1640.43 2556.08,1578.03 2571.35,1578.03 CY2.1
NetD1_1: D1.1 R1.1 | length 196.2
  Bottom Layer w15: D1.1 3223.31,1220 R1.1
NetD2_2: D2.2 R7.1 | length 111.5
  Bottom Layer w39.37: R7.1 D2.2
NetD3_1: D3.1 R8.1 | length 125
  Bottom Layer w39.37: D3.1 R8.1
NetF1_1: F1.1 L3.4 Q4.2 R24.1
  other v1: 1840,495
NetF1_2: F1.2 P1.1
NetJP4_2: JP4.2 Q5.3 | length 130.3
  Bottom Layer w15: JP4.2 3830.35,115.35 3830.35,244.65 Q5.3
NetL3_1: L3.1 P2.1 P3.1
NetP4_1: P4.1 Q4.1 R32.1 T6.1 | length 257.4
  Top Layer w15: Q4.1 v1(2100,145) ; P4.1@2586.85,120 2589.35,122.5 2727.5,122.5 T6.1
NetQ1_1: Q1.1 R28.2 R29.2 | length 151.4
  Bottom Layer w15: R28.2 R29.2 4810.7,621.7 4810.7,688.3 Q1.1
NetQ2_1: Q2.1 R30.2 R31.2 | length 145.3
  Bottom Layer w15: R30.2 R31.2 4039.4,915.4 4039.4,984.6 Q2.1
NetQ3_1: Q3.1 R26.2 | length 137
  Top Layer w15: v1(2715,435) Q3.1
  Bottom Layer w15: R26.2 v1(2715,435)
NetQ3_3: Q3.3 U3.2 | length 100.1
  Top Layer w15: U3.2 Q3.3
NetQ4_3: Q4.3 R27.1 R32.2 | length 112.2
  Top Layer w15: Q4.3 v1(2100,345)
NetQ5_1: Q5.1 R41.2 R42.2 | length 253.2
  Bottom Layer w15: R42.2 3753.7,278.7 3916.3,278.7 Q5.1 3920.2,282.2 3999.8,282.2 R41.2
NetR2_2: R2.2 R6.1 | length 120.8
  Bottom Layer w39.37: R2.2 1387,1194 1387,1076 R6.1
NetR8_2: R8.2 T1.6 | length 514.3
  Bottom Layer w39.37: R8.2 1940,710 2025,795 2025,921.94 2109.95,1006.89 T1.6
NetR9_1: R9.1 R10.2 U7.1 | length 413.9
  Bottom Layer w15: U7.1 2625,845.71 2625,915 2670,960 R10.2 R9.1
NetR22_1: R22.1 U3.1 | length 236.3
  Top Layer w15: U3.1 v1(2620,420)
  Bottom Layer w15: R22.1 2620,300 v1(2620,420)
NetR24_2: R24.2 U3.6 | length 204.1
  Top Layer w15: v1(2095,420) U3.6
  Bottom Layer w15: R24.2 2085,470 2094,461 2094,421 v1(2095,420)
NetR27_2: R27.2 U3.4 | length 307.1
  Top Layer w15: U3.4 2333.11,620 2338.11,615 v1(2340,615)
  Bottom Layer w15: R27.2 v1(2340,615)
NetR37_2: R37.2 U6.1 | length 143.9
  Bottom Layer w15: U6.1 4385,903.33 4388.33,900 4430,900 4455,875 R37.2
NetR38_2: R38.2 U6.2 | length 126.5
  Bottom Layer w15: U6.2 4335,840 4351.32,823.68 4377.5,823.68 R38.2@4385,816.18
NetRX1_1: RX1.1 RX2.2 | length 146
  Bottom Layer w39.37: RX2.2 RX1.1
NTC1_AD: C17.1 JP1.3 JP2.2 NTC.1 R33.2 | length 1895.9
  Top Layer w15: JP1.3 3053.15,96.84 3115,35 4425,35 JP2.2
  Bottom Layer w15: C17.1 4504.41,45.59 4504.41,114.41 JP2.2 4504.41,115.59 4504.41,184.41 R33.2 NTC.1
PTC_CTRL: JP1.6 R26.1 | length 597.7
  Top Layer w15: v1(3170,200) 3170.63,200.63 3170.63,270.55 JP1.6
  Bottom Layer w15: R26.1 2715,240 2755,200 v1(3170,200)
SEN_RX: JP1.9 P5.3 R19.2 | length 1422.7
  Top Layer w15: JP1.9 3289.38,155.62 3320,125 3682.32,125 3747.32,190 4225,190 4300,265 4300,309.26 4297.57,311.7 v1(4297.57,357.86)
  Bottom Layer w15: R19.2 4259,381.47 P5.3@4259.45,381.02 ; P5.3 P5.3@4259.45,381.02 ; v1(4297.57,357.86) 4259.82,357.86 4259.45,358.23 P5.3@4259.45,381.02
SEN_TX: JP1.10 JP6.2 P5.2 R18.1 | length 1221.1
  Top Layer w15: JP1.10 3328.74,320.22 3373.02,364.5 4018.61,364.5 4053.11,330 v1(4055,330)
  Bottom Layer w15: v1(4055,330) 4056.34,328.66 4056.34,318.98 4108.19,267.13 4239.4,267.13 4239.77,267.5 P5.2 4239.89,275.59 4239.89,205.11 R18.1 4240,164.37 JP6.2
SGND: C3.2 C5.2 C6.2 C7.2 C9.2 C11.1 C12.1 C13.1 C14.2 C15.2 C16.2 C17.2 CY2.2 JP1.1 JP1.13 JP2.1 JP5.1 JP6.1 NTC.2 P5.4 Q1.2 Q2.2 Q3.2 Q5.2 R5.1 R13.2 R14.2 R29.1 R31.1 R34.2 R42.1 U5.2 U8.3 U9.1 | length 952.9
  Top Layer w15: v1(3835,859) 3991.43,859 U5.2@3991.88,858.54
  Bottom Layer w15: v1(3891,986) 3891.5,985.5 3964.5,985.5 Q2.2 ; v1(3910,930) 3911.89,930 3926.89,915 R31.1 ; v1(3912,716) 3994.2,716 C15.2 ; v1(4489,308) 4543.21,308 4555,296.21 NTC.2 ; v1(4495,360) 4495.59,359.41 4559.41,359.41 C9.2 ; C17.2 v1(4645,45) ; C7.2 v1(4585,765) ; C11.1 4645,355 4675,325 v1(4705,325) ; v1(4675,620) R29.1 ; v1(4675,690) Q1.2
  other v1: 4600,1190
VCC: C22.1 D3.2 R6.2 U1.2 | length 1217.5
  PWR w39.37: U1.2 1185,947.88 1190,952.88 C22.1 1445,1190 1510,1125 v1(1510,1005) v1@1510,725
  Bottom Layer w39.37: v1(1510,720) 1510,591.46 D3.2 ; v1(1510,1005) 1512,1007 R6.2
pads on no net: JP1.16 JP1.17 P5.5 P5.6 T1.2 T1.4 T1.7 U3.3 U3.5

## Polygon pours and split planes (outlines as drawn)
SGND on Top Layer "SGND_L01_P016" (solid, pour order 16): 2272,1.83 2272,1773.48 2998.72,1773.48 cw(c2998.72,1694.74) 3077.46,1694.74 3077.46,1492.99 ccw(c3156.2,1492.99) 3156.2,1414.25 4886.06,1414.25 cw(c4886.06,1335.51) 4964.8,1335.51 4964.8,238.05 cw(c4728.58,238.05) 4728.58,1.83
NetF1_1 on Top Layer "NETF1_1_L01_P003" (solid, pour order 3): 1850,520 1865,505 1865,485.55 1849.45,470 1840,470 1785,415 1785,49.25 1760.75,25 1415,25 1395,45 1395,260 1155,260 1150,255 1030,255 995,220 955,220 930,245 930,295 945,310 1130,310 1140,320 1140,370 1150,380 1360,380 1375,395 1375,450 1395,470 1775,470 1815,510 1825,520
NetF1_2 on Top Layer "NETF1_2_L01_P001" (solid, pour order 1): 835,175 815,155 815,65 835,45 1275,45 1300,76.25 1300,150 1275,175
NetL3_1 on Top Layer "NETL3_1_L01_P000" (solid, pour order 0): 830,230 850,250 850,280 830,300 650,300 635,315 635,370 625,380 305,380 300,375 300,25 305,20 625,20 635,30 635,215 650,230
SGND on Bottom Layer "SGND_L04_P017" (solid, pour order 17): 2272,1.83 2272,1773.48 2998.72,1773.48 cw(c2998.72,1694.74) 3077.46,1694.74 3077.46,1492.99 ccw(c3156.2,1492.99) 3156.2,1414.25 4886.06,1414.25 cw(c4886.06,1335.51) 4964.8,1335.51 4964.8,238.05 cw(c4728.58,238.05) 4728.58,1.83
NetQ4_3 on Bottom Layer "NETQ4_3_L04_P010" (solid, pour order 10): 2365,335 2375,345 2375,405 2360,420 2325,420 2320,420 2305,405 2305,375 2295,365 2090,365 2080,355 2080,330 2160,250 2160,190 2175,175 2225,175 2240,190 2240,305 2270,335
NetP4_1 on Bottom Layer "NETP4_1_L04_P008" (solid, pour order 8): 2085,170 2080,165 2080,100 2090,90 2315,90 2345,60 2635,60 2650,75 2650,165 2645,170
NetC18_2 on Bottom Layer "NETC18_2_L04_P007" (solid, pour order 7): 4375,1345 4430,1345 4440,1335 4440,1280 4415,1255 4415,1085 4395,1065 4325,1065 4315,1075 4315,1150 4325,1160 4355,1160 4365,1170 4365,1335 4375,1345 4430,1345
NetC18_1 on Bottom Layer "NETC18_1_L04_P006" (solid, pour order 6): 4285,1170 4279.6,1159.6 4275,1155 4215,1155 4210,1150 4210,1080 4220,1070 4295,1070 4305,1080 4305,1155 4316.43,1177.86 4338.33,1183.33 4355,1200 4355,1340 4345,1350 4295,1350 4285,1340 4285,1265
NetF1_1 on Bottom Layer "NETF1_1_L04_P004" (solid, pour order 4): 1960,505 1870,505 1860,515 1830,515 1820,505 1820,480 1825,475 1890,475 1895,470 1895,440 1900,435 1965,435 1970,440 1970,495 1970,500
+12V on PWR "+12V_L03_P015" (solid, pour order 15): 2845,1395 2779,1329 2779,86 2835,30 4785,30 4930,175 4935,175 4935,1330 4870,1395
GND on GND "GND_L02_P021" (solid, pour order 21): 236.77,1.49 cw(c236.77,237.71) 0.55,237.71 0.55,1694.4 cw(c79.29,1694.4) 79.29,1773.14 2995.11,1773.14 cw(c2995.11,1694.4) 3073.85,1694.4 3073.85,1492.65 ccw(c3152.59,1492.65) 3152.59,1413.91 4882.44,1413.91 cw(c4882.44,1335.17) 4961.18,1335.17 4961.18,237.71 cw(c4724.96,237.71) 4724.96,1.49
SGND on GND "SGND_L02_P018" (solid, pour order 18): 2272,1.83 2272,1773.48 2998.72,1773.48 cw(c2998.72,1694.74) 3077.46,1694.74 3077.46,1492.99 ccw(c3156.2,1492.99) 3156.2,1414.25 4886.06,1414.25 cw(c4886.06,1335.51) 4964.8,1335.51 4964.8,238.05 cw(c4728.58,238.05) 4728.58,1.83

## Other copper
Top Layer:
  pour cut-out: 2720,750 2745,775 2745,1080 2775,1110 2865,1110 2890,1135 2890,1465 2880,1475 2195,1475 2195,785 2230,750
GND:
  pour cut-out: 2720,750 2745,775 2745,1080 2775,1110 2865,1110 2890,1135 2890,1465 2880,1475 2195,1475 2195,785 2230,750
Bottom Layer:
  pour cut-out: 2720,750 2745,775 2745,1080 2775,1110 2865,1110 2890,1135 2890,1465 2880,1475 2195,1475 2195,785 2230,750

## Silkscreen, mask and mechanical layers (free items; w line width, h text height)
Mechanical 2:
  circle w0.5: c4764.33,198.34 r68.9
  circle w0.5: c4803.7,1256.43 r68.9
  circle w0.5: c158.03,1615.66 r68.9
  circle w0.5: c197.4,198.34 r68.9